# EAGLE board v6 (EAGLE 6.2), part 1 of 2
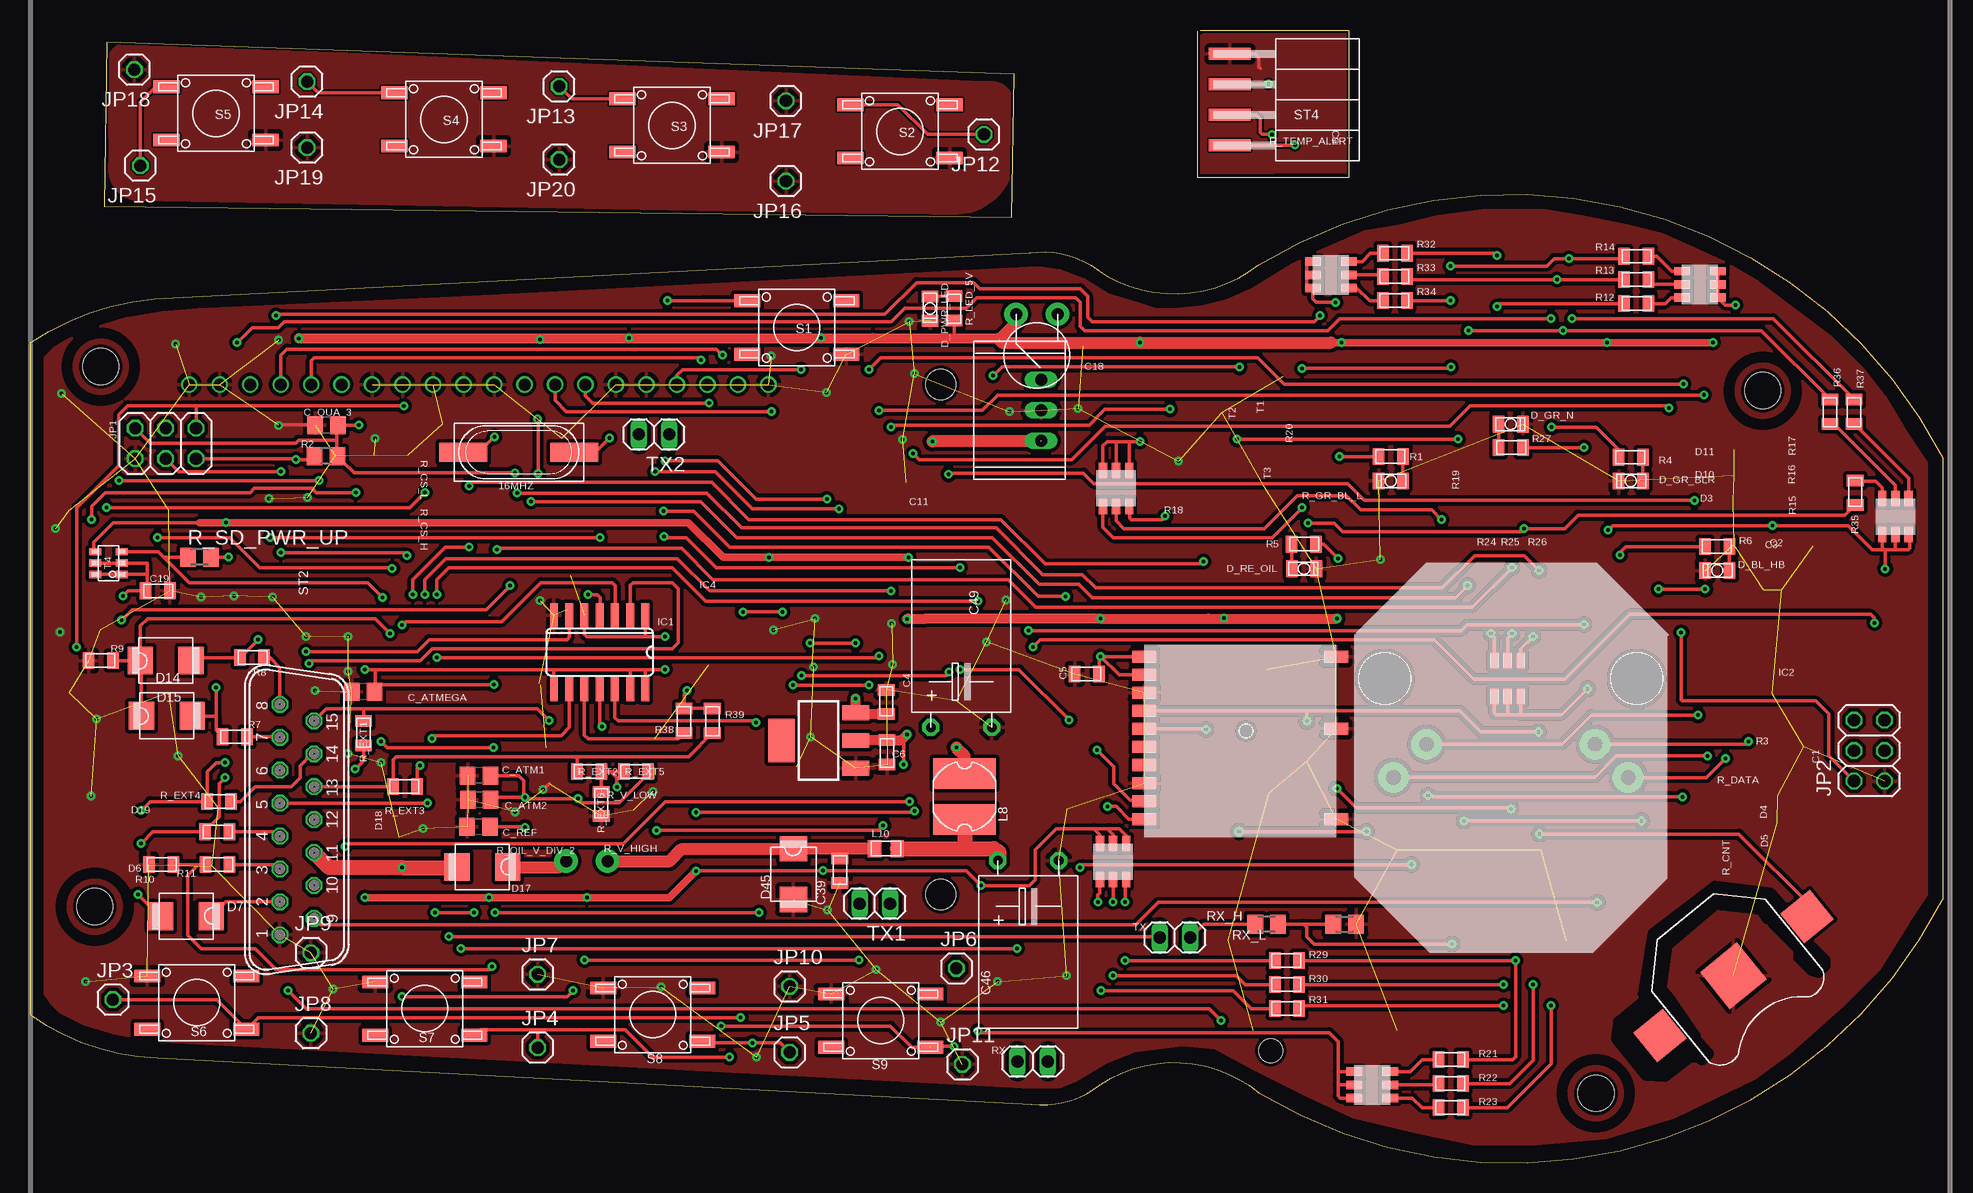
[diagram p0: board, top side]
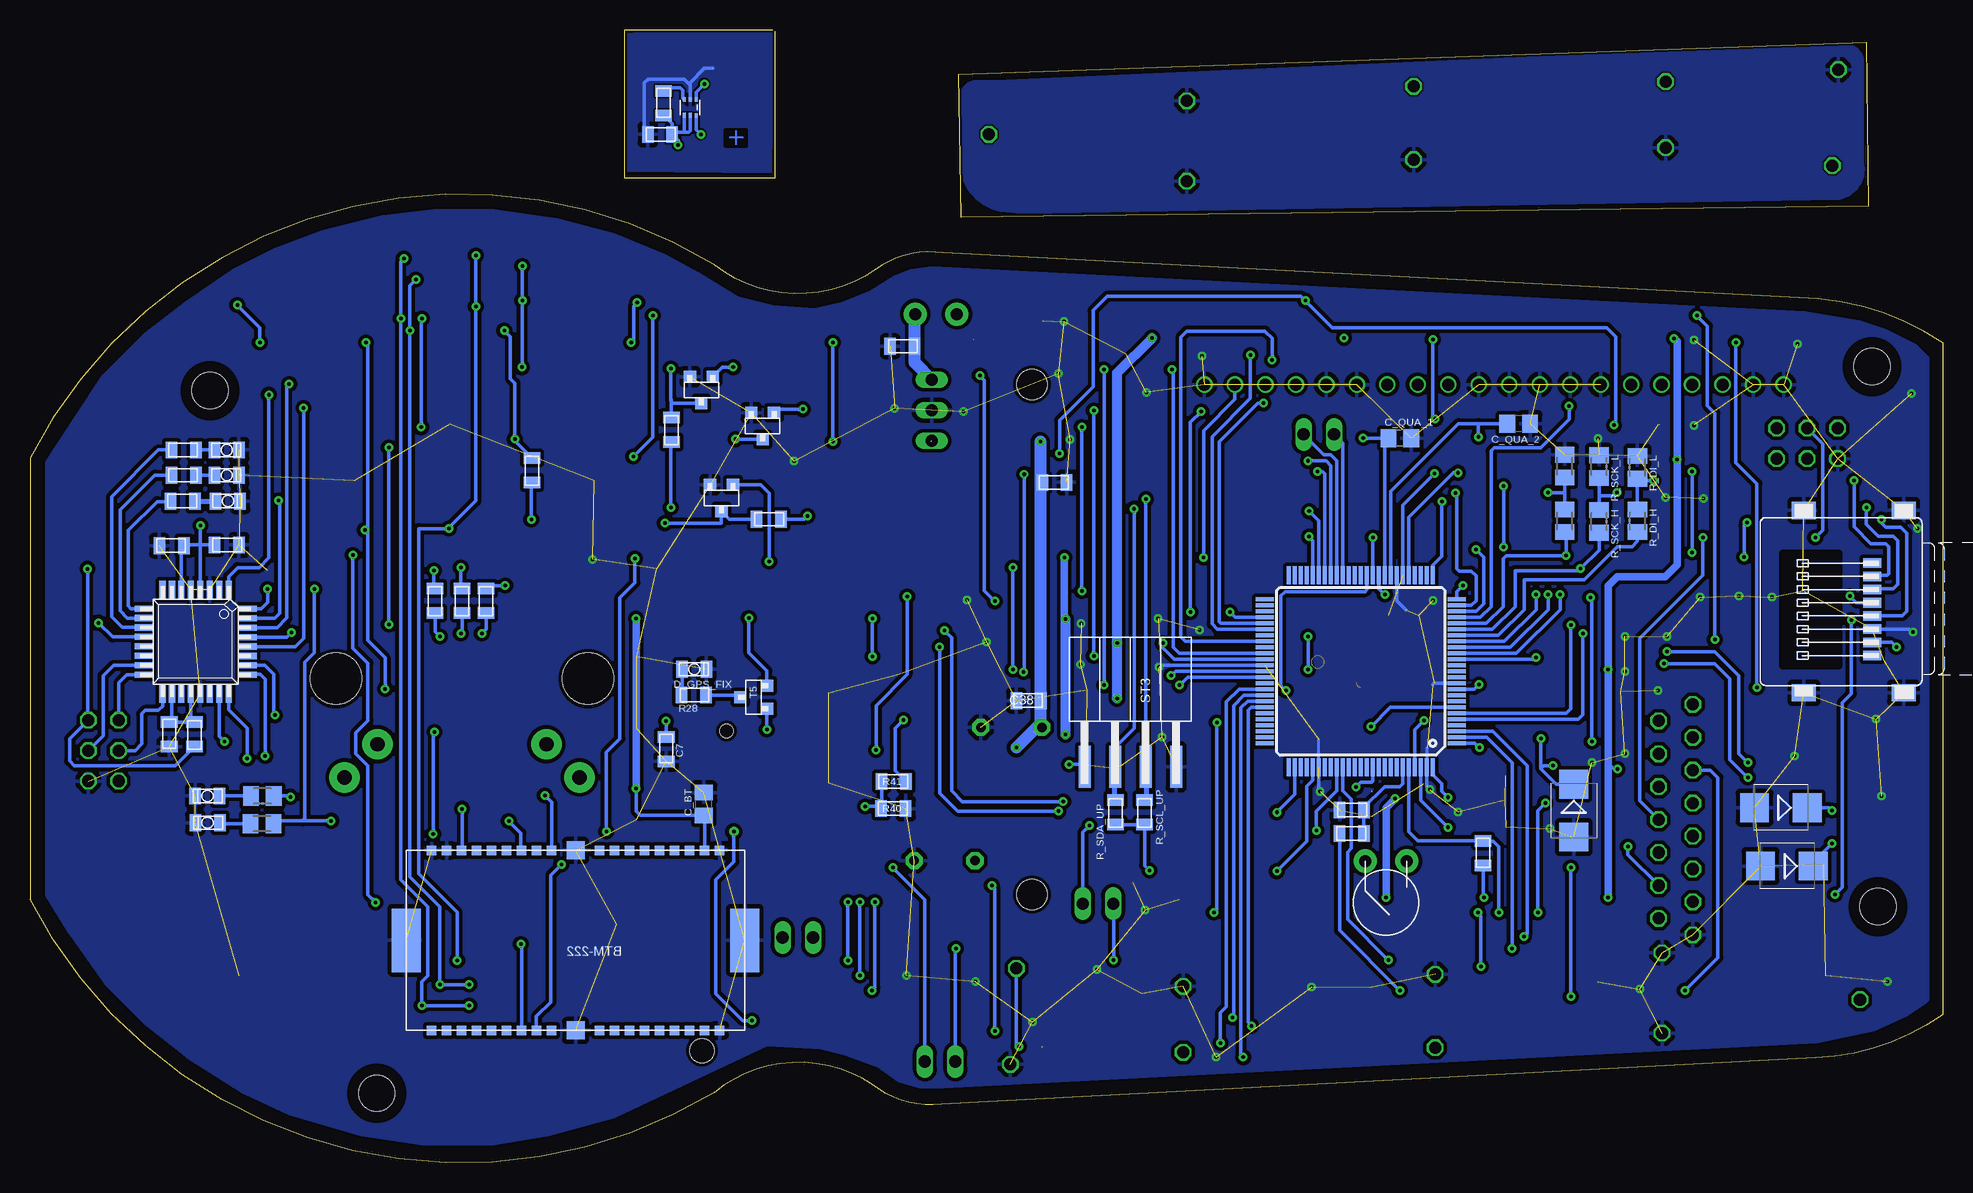
[diagram p1: board, bottom side, seen from below]

Size 159.4 x 94.39 mm. Coordinates in mm from the lower left corner, seen from the top.
Outline: 10.4,71.98 83.35,75.83
Outline: 10.41,71.98 arc29 0,68.34 0,12.34 arc33 10.6,8.74
Outline: 10.59,8.74 83.46,4.88
Outline: 83.32,75.82 arc-45 88.97,74.39
Outline: 88.91,74.44 arc73 102.4,74.84 arc-94 159.4,58.74 159.4,21.94 arc-94 102.4,5.84 arc73 89.17,6.5
Outline: 83.45,4.87 arc45 89.18,6.51
Outline: 97.5,94.39 109.9,94.39 109.9,82.09 97.3,82.09 97.3,94.29
Outline: 6.2,79.69 81.8,78.79 82,90.69 6.4,93.39 6.2,79.69
Copper layers (1*16): Top 0.035mm / dielectric 1.5mm / Bottom 0.035mm
Design rules: minimum track width 0.18mm, minimum drill 0.3mm, track to track 0.15mm, track to pad 0.15mm, pad to pad 0.15mm, via to via 0.15mm, smd to smd 0mil, copper to edge 0.1981mm, drill to drill 0.1981mm, minimum pad ring 0.18mm, minimum via ring 8mil, stop-mask expansion 0mil, vias tented up to drill 25mil, thermal gap 15mil
Net classes: 0 default: width 0.18 mm, drill 0.3 mm, clearance 0.15 mm
Holes 3 mm at 5.4,21.34 5.9,66.34 130.5,5.78 144.4,64.34
Holes 2 mm at 103.4,9.34
tRestrict: area 2.6,18.5 to 8.2,24.1; area 3.1,63.5 to 8.7,69.1; area 127.7,3 to 133.3,8.6; area 141.6,61.5 to 147.2,67.1; area 147.4,15.9 to 149.5,17.9; area 138.2,8.6 to 139.8,10.3; area 145.2,17.8 to 147.5,20.5; area 132.2,7.2 to 138.5,13.7; area 134.4,12.8 to 146.1,23.1; area 135.9,10.1 to 138.8,13.2
bRestrict: area 3.4,19.3 to 7.4,23.3; area 3.9,64.3 to 7.9,68.3; area 128.5,3.8 to 132.5,7.8; area 142.4,62.3 to 146.4,66.3

## Footprints (pad centres in the part's own frame; a part is rotated, then mirrored left to right if it is on the bottom)
POLY_FUSE = drill 1 pad 1.93: P$1 -1.73,0; P$2 1.73,0
XT-HC49S-SMD = smd 4 x 1.6: 1 -4.617,0; 2 4.617,0
RGB_LED = smd 1.3 x 0.7: B+ 0,0.55; B- 3,0.55; G+ 0,1.65; G- 3,1.65; R+ 0,2.75; R- 3,2.75
BATTCON_12MM = smd 3.962 x 3.962: GND 0,0 | smd 3.175 x 3.175: PWR@1 -7.874,0; PWR@2 7.874,0
BTM-222 = smd 0.8 x 0.8: P$1 -12.635,-7.5; P$2 -11.385,-7.5; P$3 -10.135,-7.5; P$4 -8.885,-7.5; P$5 -7.635,-7.5; P$6 -6.385,-7.5; P$7 -5.135,-7.5; P$8 -3.885,-7.5; P$9 -2.635,-7.5; P$11 1.365,-7.5; P$12 2.615,-7.5; P$13 3.865,-7.5; P$14 5.115,-7.5; P$15 6.365,-7.5; P$16 7.615,-7.5; P$17 8.865,-7.5; P$18 10.115,-7.5; P$19 11.365,-7.5; P$20 11.365,7.5; P$21 10.115,7.5; P$22 8.865,7.5; P$23 7.615,7.5; P$24 6.365,7.5; P$25 5.115,7.5; P$26 3.865,7.5; P$27 2.615,7.5; P$28 1.365,7.5; P$30 -2.635,7.5; P$31 -3.885,7.5; P$32 -5.135,7.5; P$33 -6.385,7.5; P$34 -7.635,7.5; P$35 -8.885,7.5; P$36 -10.135,7.5; P$37 -11.385,7.5; P$38 -12.635,7.5 | smd 1.5 x 1.5: P$10 -0.635,-7.5; P$29 -0.635,7.5 | smd 2.4 x 5.3: P$AGND -14.735,0; P$BGND 13.465,0
0805 = smd 0.965 x 1.397: 1 -1.016,0; 2 1.016,0
EL-5-8X13R = drill 0.8 pad 1.422 octagon: 1 0,2.54; 2 0,-2.54
EL-5-8X13 = drill 0.8 pad 1.422 octagon: 1 0,-2.54; 2 0,2.54
C0805 = smd 1.3 x 1.5: 1 -0.95,0; 2 0.95,0
LED-0805 = smd 0.965 x 1.397: 1 -1.016,0; 2 1.016,0
SMB = smd 2.4 x 2.4: A 2.2,0; C -2.2,0
SMB' = smd 2.1 x 2.3: A -2.114,0; K 2.114,0
SOT223 = smd 1.219 x 2.235: 1 -2.311,-3.099; 2 0,-3.099; 3 2.311,-3.099 | smd 3.6 x 2.2: 4 0,3.099
MT3329 = smd 2 x 1: 3D-FIX -8.5,0.15; D+ -8.5,-1.35; D- -8.5,-2.85; EN -8.5,4.65; GND -8.5,3.15; GND2 -8.5,-4.35; GND_3 7.5,6.15; GND_4 7.5,0.15; GND_5 7.5,-7.35; RXD -8.5,-7.35; TXD -8.5,-5.85; VBACKUP -8.5,1.65; VCC -8.5,6.15 | hole 1.1: 0,0
SO14 = smd 0.66 x 2.032: 1 -3.81,-3.073; 2 -2.54,-3.073; 3 -1.27,-3.073; 4 0,-3.073; 5 1.27,-3.073; 6 2.54,-3.073; 7 3.81,-3.073; 8 3.81,3.073; 9 2.54,3.073; 10 1.27,3.073; 11 0,3.073; 12 -1.27,3.073; 13 -2.54,3.073; 14 -3.81,3.073
TQFP-32_7X7 = smd 0.508 x 1.5: 1 -2.756,-4.331; 2 -1.968,-4.331; 3 -1.181,-4.331; 4 -0.394,-4.331; 5 0.394,-4.331; 6 1.181,-4.331; 7 1.968,-4.331; 8 2.756,-4.331; 17 2.756,4.331; 18 1.968,4.331; 19 1.181,4.331; 20 0.394,4.331; 21 -0.394,4.331; 22 -1.181,4.331; 23 -1.968,4.331; 24 -2.756,4.331 | smd 1.5 x 0.508: 9 4.331,-2.756; 10 4.331,-1.968; 11 4.331,-1.181; 12 4.331,-0.394; 13 4.331,0.394; 14 4.331,1.181; 15 4.331,1.968; 16 4.331,2.756; 25 -4.331,2.768; 26 -4.331,1.981; 27 -4.331,1.194; 28 -4.331,0.406; 29 -4.331,-0.381; 30 -4.331,-1.169; 31 -4.331,-1.956; 32 -4.331,-2.756
TQFP100 = smd 1.5 x 0.35: 1 -8,6; 2 -8,5.5; 3 -8,5; 4 -8,4.5; 5 -8,4; 6 -8,3.5; 7 -8,3; 8 -8,2.5; 9 -8,2; 10 -8,1.5; 11 -8,1; 12 -8,0.5; 13 -8,0; 14 -8,-0.5; 15 -8,-1; 16 -8,-1.5; 17 -8,-2; 18 -8,-2.5; 19 -8,-3; 20 -8,-3.5; 21 -8,-4; 22 -8,-4.5; 23 -8,-5; 24 -8,-5.5; 25 -8,-6; 51 8,-6; 52 8,-5.5; 53 8,-5; 54 8,-4.5; 55 8,-4; 56 8,-3.5; 57 8,-3; 58 8,-2.5; 59 8,-2; 60 8,-1.5; 61 8,-1; 62 8,-0.5; 63 8,0; 64 8,0.5; 65 8,1; 66 8,1.5; 67 8,2; 68 8,2.5; 69 8,3; 70 8,3.5; 71 8,4; 72 8,4.5; 73 8,5; 74 8,5.5; 75 8,6 | smd 0.35 x 1.5: 26 -6,-8; 27 -5.5,-8; 28 -5,-8; 29 -4.5,-8; 30 -4,-8; 31 -3.5,-8; 32 -3,-8; 33 -2.5,-8; 34 -2,-8; 35 -1.5,-8; 36 -1,-8; 37 -0.5,-8; 38 0,-8; 39 0.5,-8; 40 1,-8; 41 1.5,-8; 42 2,-8; 43 2.5,-8; 44 3,-8; 45 3.5,-8; 46 4,-8; 47 4.5,-8; 48 5,-8; 49 5.5,-8; 50 6,-8; 76 6,8; 77 5.5,8; 78 5,8; 79 4.5,8; 80 4,8; 81 3.5,8; 82 3,8; 83 2.5,8; 84 2,8; 85 1.5,8; 86 1,8; 87 0.5,8; 88 0,8; 89 -0.5,8; 90 -1,8; 91 -1.5,8; 92 -2,8; 93 -2.5,8; 94 -3,8; 95 -3.5,8; 96 -4,8; 97 -4.5,8; 98 -5,8; 99 -5.5,8; 100 -6,8
2X03 = drill 1.016 octagon: 1 -2.54,-1.27; 2 -2.54,1.27; 3 0,-1.27; 4 0,1.27; 5 2.54,-1.27; 6 2.54,1.27
1X01 = drill 1.016 octagon: 1 0,0
L-PD54 = smd 2.54 x 5.2: 1 -1.905,0; 2 1.905,0
0805+603 = smd 1.11 x 1.43: 1 -0.953,0; 2 0.953,0
NHD_2.7_SOLO_RO = drill 1: CS -102.51,24.5; DC -69.49,24.5; GND0 -61.87,24.5; GND1 -72.03,24.5; GND2 -74.57,24.5; GND3 -84.73,24.5; GND4 -87.27,24.5; GND5 -89.81,24.5; GND6 -92.35,24.5; GND7 -94.89,24.5; GND8 -107.59,24.5; GND9 -110.13,24.5; NC0 -66.95,24.5; NC1 -82.19,24.5; NC2 -97.43,24.5; NC3 -105.05,24.5; RES -99.97,24.5; SCLK -77.11,24.5; SDIN -79.65,24.5; VDD0 -64.41,24.5 | hole 2.5: -47.5,-18; -47.5,24.5
SIP3 = drill 1 long: GND 5.75,2; IN 3.21,2; OUT 8.29,2
R0805 = smd 1.3 x 1.5: 1 -0.95,0; 2 0.95,0
M0805 = smd 1.3 x 1.6: 1 -0.95,0; 2 0.95,0
1X02 = drill 1.016 long: 1 -1.27,0; 2 1.27,0
SW-ECO = smd 2.184 x 1.067: 1 -4.128,2.223; 2 -4.128,-2.223; 3 4.128,2.223; 4 4.128,-2.223
SD_MICRO = smd 0.8 x 1.5: 1 3.2,-9.35; 2 2.1,-9.35; 3 1,-9.35; 4 -0.1,-9.35; 5 -1.2,-9.35; 6 -2.3,-9.35; 7 -3.4,-9.35; 8 -4.5,-9.35 | smd 1.45 x 2: GND 7.6,-11.95; GND2 7.6,-3.65; GND3 -7.6,-11.95; GND4 -7.6,-3.65
BL17SMD_1X4 = smd 1 x 3.5: 1 -3.81,-7.31; 2 -1.27,-7.31; 3 1.27,-7.31; 4 3.81,-7.31
SOT-23 = smd 1.016 x 1.016: 1 0.953,1.111; 2 -0.952,1.111; 3 0,-1.111
SOT-23-6 = smd 0.61 x 1.016: 1 -0.95,-1.1; 2 0,-1.1; 3 0.95,-1.1; 4 0.95,1.1; 5 0,1.1; 6 -0.95,1.1
SOT563 = smd 0.25 x 0.4: 1 -0.5,-0.66; 2 0,-0.66; 3 0.5,-0.66; 4 0.5,0.66; 5 0,0.66; 6 -0.5,0.67
STEPPER = drill 1.2 pad 2.54: 1+ 5.47,7.03; 1- 8.23,9.785; 2+ 8.23,-9.785; 2- 5.47,-7.03 | hole 4.3: 0,10.5; 0,-10.5
IP67-SUB-D = drill 1.016 octagon: 1 -9.601,1.422; 2 -6.858,1.422; 3 -4.115,1.422; 4 -1.372,1.422; 5 1.372,1.422; 6 4.115,1.422; 7 6.858,1.422; 8 9.601,1.422; 9 -8.23,-1.422; 10 -5.486,-1.422; 11 -2.743,-1.422; 12 0,-1.422; 13 2.743,-1.422; 14 5.486,-1.422; 15 8.23,-1.422

## Placement (x,y rotation side)
5V_F  600mA  [POLY_FUSE]  83.9,70.72 180 top
12V_F1  1.1A  [POLY_FUSE]  46.4,25.14 180 bottom
16MHZ  16Mhz  [XT-HC49S-SMD]  40.74,59.21 180 top
18632422  RGB_LED  [RGB_LED]  88.85,57.69 270 top
BAT_CLIP1  F_908642  [BATTCON_12MM]  141.96,15.57 219 top
BLUETOOTH  BTM-222  [BTM-222]  114.57,18.53 180 bottom
C1  100nF  [0805]  147.8,35.69 270 bottom
C2  100nF  [0805]  147.6,51.42 0 bottom
C3  100nF  [0805]  143,51.48 180 bottom
C4  100n/20V  [0805]  71.35,38.39 270 top
C5  100nF  [0805]  88.08,40.72 0 top
C6  10u/20V  [0805]  71.42,34.19 90 top
C7  100nF  [0805]  106.38,34.47 270 bottom
C9  100nF  [0805]  106.9,85.69 180 bottom
C11  100n/20V  [0805]  74.03,56.69 0 bottom
C18  100n/20V  [0805]  86.7,68.04 180 bottom
C19  100n  [0805]  10.64,47.66 180 top
C38  2µ2/100V  [0805]  76.19,38.51 0 bottom
C39  2µ2/100V  [0805]  67.49,24.34 270 top
C46  470µ  [EL-5-8X13R]  83.19,25.17 90 top
C49  470µ  [EL-5-8X13]  77.62,36.27 270 top
C_ATM1  100nF  [C0805]  37.42,32.26 180 top
C_ATM2  100nF  [C0805]  37.44,30.23 180 top
C_ATMEGA  100nF  [C0805]  27.77,39.24 180 top
C_BT  200nF  [C0805]  103.25,29.89 90 bottom
C_QUA_1  22pF  [C0805]  45.25,60.37 180 bottom
C_QUA_2  22pF  [C0805]  35.35,61.59 180 bottom
C_QUA_3  22pF  [C0805]  24.7,61.46 180 top
C_REF  100nF  [C0805]  37.37,27.98 180 top
D3  [LED-0805]  142.91,55.13 0 bottom
D4  Red  [LED-0805]  144.62,30.56 180 bottom
D5  Blue  [LED-0805]  144.6,28.33 180 bottom
D6  20V-Zdiode  [SMB]  12.99,24.72 180 bottom
D7  SS24  [SMB']  13,20.54 0 top
D10  [LED-0805]  143,57.29 0 bottom
D11  [LED-0805]  143,59.39 0 bottom
D14  SS24  [SMB']  11.3,41.84 180 top
D15  SS24  [SMB']  11.4,37.24 180 top
D17  SS24  [SMB']  37.7,24.64 0 top
D18  20V-ZD.  [SMB]  30.75,29.34 270 bottom
D19  20V-ZD.  [SMB]  13.5,29.59 180 bottom
D45  SM6T30V  [SMB']  63.62,24.04 90 top
D_BL_HB  HighB _ 645-598-8191-107F  [LED-0805]  140.6,49.34 180 top
D_GPS_FIX  Red  [LED-0805]  104.05,41.12 0 bottom
D_GR_BLR  BL_R  [LED-0805]  133.4,56.81 180 top
D_GR_N  N _ M 645-598-8110-107F  [LED-0805]  123.4,61.54 0 top
D_PWR_LED  Red  [LED-0805]  75,71.18 270 top
D_RE_OIL  OIL M 645-598-8110-107F  [LED-0805]  106.17,49.49 0 top
DCDC53.3  AP1117E33G  [SOT223]  65.71,35.18 90 top
GPS  MT3329  [MT3329]  101.35,35.99 0 top
IC1  4093D  [SO14]  47.47,42.54 180 top
IC2  AT-MEGA-8  [TQFP-32_7X7]  145.6,43.42 180 bottom
IC4  ATMEGA2560-16AU  [TQFP100]  48.5,40.95 180 bottom
JP1  ICSP  [2X03]  11.3,59.94 0 top
JP2  ICSP  [2X03]  153.28,34.34 90 top
JP3  [1X01]  6.9,13.59 0 top
JP4  [1X01]  42.3,9.59 0 top
JP5  [1X01]  63.3,9.19 0 top
JP6  [1X01]  77.2,16.19 0 top
JP7  [1X01]  42.3,15.69 0 top
JP8  [1X01]  23.4,10.79 0 top
JP9  [1X01]  23.4,17.49 0 top
JP10  [1X01]  63.3,14.69 0 top
JP11  [1X01]  77.7,8.19 0 top
JP12  [1X01]  79.5,85.69 180 top
JP13  [1X01]  44.1,89.69 180 top
JP14  [1X01]  23.1,90.09 180 top
JP15  [1X01]  9.2,83.09 180 top
JP16  [1X01]  63,81.79 180 top
JP17  [1X01]  63,88.49 180 top
JP18  [1X01]  8.7,91.09 180 top
JP19  [1X01]  23.1,84.59 180 top
JP20  [1X01]  44.1,83.59 180 top
L8  22µH 1A  [L-PD54]  77.88,30.52 90 top
L10  BLM21PG221SN1  [0805+603]  71.32,26.17 0 top
NHD_2.7  NHD_2.7_SOLO_RO  [NHD_2.7_SOLO_RO]  123.4,40.34 0 top
PWR_R78  R-7805-1.0  [SIP3]  86.25,56.97 90 top
R1  250R  [0805]  113.4,58.84 0 top
R2  10K  [R0805]  24.67,58.88 180 top
R3  10R  [0805]  145.7,35.69 90 bottom
R4  250R  [0805]  133.4,58.79 0 top
R5  565R  [0805]  106.15,51.55 180 top
R6  490R  [0805]  140.6,51.34 0 top
R7  310R  [0805]  17.05,35.49 180 top
R8  310R  [0805]  18.5,42.09 180 top
R9  10k  [0805]  5.9,41.84 0 top
R10  5k / n.b. (Reed)  [0805]  10.93,24.84 180 top
R11  7k  [0805]  15.62,24.84 180 top
R12  100R  [0805]  133.85,71.59 180 top
R13  90R  [0805]  133.85,73.59 180 top
R14  90R  [0805]  133.85,75.54 180 top
R15  1k  [0805]  146.67,55.13 0 bottom
R16  1k  [0805]  146.6,57.29 0 bottom
R17  1k  [0805]  146.6,59.39 0 bottom
R18  100R  [0805]  97.85,53.62 180 bottom
R19  90R  [0805]  117.58,57.72 90 bottom
R20  90R  [0805]  105.95,61.09 90 bottom
R21  100R  [0805]  118.4,8.59 0 top
R22  90R  [0805]  118.4,6.59 0 top
R23  90R  [0805]  118.4,4.59 0 top
R24  100R  [0805]  121.4,46.84 90 bottom
R25  90R  [0805]  123.4,46.84 90 bottom
R26  90R  [0805]  125.65,46.84 90 bottom
R27  560R  [0805]  123.4,59.59 180 top
R28  1k  [0805]  104.08,38.97 180 bottom
R29  100R  [0805]  104.75,16.84 0 top
R30  90R  [0805]  104.75,14.84 0 top
R31  90R  [0805]  104.75,12.84 0 top
R32  100R  [0805]  113.75,75.79 0 top
R33  90R  [0805]  113.75,73.84 0 top
R34  90R  [0805]  113.75,71.84 0 top
R35  100R  [0805]  152.1,55.84 270 top
R36  90R  [0805]  150,62.59 90 top
R37  90R  [0805]  152,62.59 90 top
R38  0R  [0805]  54.5,36.84 90 top
R39  n.b.  [0805]  56.86,36.84 90 top
R40  2k7  [0805]  87.45,29.52 0 bottom
R41  1k2  [0805]  87.42,31.77 0 bottom
R_CNT  220R  [M0805]  140.06,28.25 0 bottom
R_CS_H  1k2  [M0805]  31.5,53.49 270 bottom
R_CS_L  2k7  [M0805]  31.5,58.04 270 bottom
R_DATA  220R  [M0805]  140.04,30.56 0 bottom
R_DI_H  1k2  [M0805]  25.45,53.49 270 bottom
R_DI_L  2k7  [M0805]  25.45,57.94 270 bottom
R_DZ_DIV1  5k  [0805]  15.61,27.58 180 top
R_EXT1  390R  [0805]  27.8,35.79 270 top
R_EXT2  n.b.  [0805]  46.6,32.59 0 top
R_EXT3  5k  [0805]  31.25,31.34 0 top
R_EXT4  5k  [0805]  15.75,30.09 180 top
R_EXT5  n.b.  [0805]  50.5,32.59 0 top
R_EXT6  n.b.  [0805]  47.6,29.89 270 top
R_GR_BL_L  BL_L  [LED-0805]  113.4,56.81 180 top
R_LED_5V  1k  [0805]  77,71.22 90 top
R_OIL_V_DIV_2  220  [0805]  38.31,25.79 270 bottom
R_SCK_H  1k2  [M0805]  28.65,53.44 270 bottom
R_SCK_L  2k7  [M0805]  28.65,58 270 bottom
R_SCL_UP  1K  [0805]  66.53,29.19 90 bottom
R_SD_PWR_UP  10k  [M0805]  14.12,50.47 0 top
R_SDA_UP  1K  [0805]  68.95,29.19 90 bottom
R_TEMP_ALERT  1k  [0805]  106.6,88.29 270 bottom
R_V_HIGH  2k2  [0805]  49.25,27.44 0 bottom
R_V_LOW  1k  [0805]  49.25,29.39 180 bottom
RX  [1X02]  83.56,8.44 0 top
RX_H  1k2  [M0805]  103.06,19.88 0 top
RX_L  2k7  [M0805]  109.56,19.88 180 top
S1  [SW-ECO]  63.91,69.6 180 top
S2  U  [SW-ECO]  72.5,85.94 180 top
S3  R  [SW-ECO]  53.5,86.44 180 top
S4  D  [SW-ECO]  34.5,86.94 180 top
S5  L  [SW-ECO]  15.5,87.44 180 top
S6  U  [SW-ECO]  13.9,13.34 0 top
S7  R  [SW-ECO]  32.9,12.84 0 top
S8  D  [SW-ECO]  51.9,12.34 0 top
S9  L  [SW-ECO]  70.9,11.84 0 top
ST2  SD_MICRO  [SD_MICRO]  15.22,46.76 90 bottom
ST3  [BL17SMD_1X4]  67.7,40.29 0 bottom
ST4  [BL17SMD_1X4]  107.3,88.59 270 top
T1  Farnell: 1299313  [SOT-23]  103.45,64.39 0 bottom
T2  Farnell: 1299313  [SOT-23]  98.35,61.39 0 bottom
T3  Farnell: 1299313  [SOT-23]  101.78,55.39 0 bottom
T4  T-IRLMS6702  [SOT-23-6]  6.55,49.97 90 top
T5  Farnell: 1299313  [SOT-23]  99.1,38.79 270 bottom
TMP102AIDRLT  TMP102  [SOT563]  104.4,87.94 180 bottom
TX  [1X02]  95.42,18.77 180 top
TX1  [1X02]  70.4,21.59 180 top
TX2  [1X02]  52,60.69 180 top
U$3  STEPPER  [STEPPER]  123.4,40.34 270 top
U$14  RGB_LED  [RGB_LED]  157.1,52.34 90 top
U$15  RGB_LED  [RGB_LED]  140.65,74.84 180 top
U$16  RGB_LED  [RGB_LED]  106.9,72.34 0 top
U$18  RGB_LED  [RGB_LED]  88.6,26.59 270 top
U$19  RGB_LED  [RGB_LED]  110.35,4.84 0 top
U$20  RGB_LED  [RGB_LED]  124.78,38.84 90 top
X2  [IP67-SUB-D]  22.25,28.59 90 top

## Library data of the parts
5V_F 12V_F1 18632422 DCDC53.3 GPS NHD_2.7 PWR_R78 ST2 U$3 U$14-U$16 U$18-U$20 = Kolja
16MHZ = XT
BAT_CLIP1 TMP102AIDRLT = SparkFun
BLUETOOTH = btm-222
C1-C7 C9 C11 C18 C19 C38 C39 C46 C49 D7 D14 D15 D17 D45 L8 L10 R1 R3-R41 R_DZ_DIV1 R_EXT1-R_EXT6 R_LED_5V R_OIL_V_DIV_2 R_SCL_UP R_SDA_UP R_TEMP_ALERT R_V_HIGH R_V_LOW T1-T5 = RCLDT
C_ATM1 C_ATM2 C_ATMEGA C_BT C_QUA_1-C_QUA_3 C_REF R2 R_CNT R_DATA = rcl
D3-D5 D10 D11 D_BL_HB D_GPS_FIX D_GR_BLR D_GR_N D_PWR_LED D_RE_OIL R_GR_BL_L = OPTO
D6 D18 D19 = diode
IC1 = 40xx
IC2 = µP´s+Pic´s
IC4 = atmel-2005
JP1-JP20 RX TX TX1 TX2 = pinhead
R_CS_H R_CS_L R_DI_H R_DI_L R_SCK_H R_SCK_L R_SD_PWR_UP RX_H RX_L = resistor
S1-S9 = SWITCH+RELAIS
ST3 ST4 = Stift+Buchsenleisten; ARTIKELNUMMER: 151469; BESONDERHEITEN: Teilstück von 10pol. Buchsenleiste; HERSTELLER: Fischer BL17/SMD-10/Z (lose), MPE BL SMD 30-010 C/TRU(reel); PACKAGE: SMD liegend L=7mm; RM: 2,54; STROM: 3A; WERT: 4Pin.
X2 = Kolja2

## Nets
12V: D17.A R_V_HIGH.1 X2.11
12V_SAFE: 12V_F1.P$2 C39.1 D45.K L10.1
+3V3_EXT: BLUETOOTH.P$2 BLUETOOTH.P$17 C5.2 C6.2 C_BT.1 DCDC53.3.2 GPS.EN GPS.VCC NHD_2.7.VDD0 R_SD_PWR_UP.2 ST3.1 T4.4 T5.2
+3V3_EXT_S: C19.2 ST2.4 T4.1 T4.2 T4.5 T4.6
A0: IC4.97 R_EXT1.1 X2.15
A1: IC4.96 R_OIL_V_DIV_2.1 X2.5
A2: IC4.95 R_V_HIGH.2 R_V_LOW.1
A3: IC4.94
A4: IC4.93
A5: IC4.92
A6: IC4.91
A7: IC4.90 R_EXT2.2 R_EXT5.1 R_EXT6.1
A8: IC4.89
A9: IC4.88
A10: IC4.87
A11: IC4.86
A12: IC4.85 TX1.2
A13: IC4.84 TX1.1
A14: IC4.83
A15: IC4.82
ANT: BLUETOOTH.P$37
ARD_RES_OUT: C_QUA_3.1 IC2.28 IC4.30 JP1.2 R2.1 S1.4
ARD_RX_5: RX_H.1 TX.1
ARD_RX_33: BLUETOOTH.P$26 RX_H.2 RX_L.2
B_D: IC4.66 JP5.1 S8.4
B_L: IC4.69 JP6.1 S9.4
B_R: IC4.68 JP4.1 S7.4
B_U: IC4.67 JP3.1 S6.4
BAT+: C11.1 C38.2 C49.1 L8.2 PWR_R78.IN
BL_L: R8.1 X2.8
BL_R: R7.1 X2.7
BLUE_INSTR: R14.2 R20.2 R23.2 R31.2 R34.2 R37.2 T1.3
CONNECT: BLUETOOTH.P$13 IC2.32 R_CNT.2
D2: IC1.3 IC4.6
D3: IC1.11 IC4.7
D4: IC4.1 R_SD_PWR_UP.1 T4.3
D5: D14.K D15.K IC4.5 R9.2
D6: IC2.1 IC4.15
D7: IC4.16 T3.1
D8: IC4.17 T2.1
D9: IC4.18 T1.1
D10: IC4.23 R25.2
D11: IC4.24 R26.2
D12: D7.A IC4.25
D13: IC4.26 R24.2
D20: IC4.44 R_SDA_UP.2 ST3.2
D21: IC4.43 R_SCL_UP.2 ST3.3
D22: IC4.78
D23: IC2.12 IC4.77
D24: IC4.76
D25: IC4.75
D26: IC4.74
D27: IC4.73
D28: IC4.72
D29: IC4.71
D30: IC4.60 NHD_2.7.DC
D31: IC4.59
D32: IC4.58 NHD_2.7.RES
D33: IC4.57
D34: IC4.56 NHD_2.7.CS
D35: IC4.55 NHD_2.7.SCLK
D36: IC4.54 NHD_2.7.SDIN
D37: IC4.53
D38: IC4.50
D39: IC4.70
D40: IC4.52
D41: IC4.51
D42: IC4.42 TX2.1
D43: IC4.41 TX2.2
D44: IC4.40
D45: IC4.39
D46: IC4.38
D47: IC4.37 R38.2 R39.2
D48: IC4.36 X2.12
D49: IC1.4 IC4.35
D50: IC4.22 JP1.6 ST2.7
D51: IC4.21 JP1.3 R_CS_H.2
D52: IC4.20 JP1.4 R_SCK_H.2
D53: IC4.19 R_DI_H.2
DZ: D6.C IC1.2 R_DZ_DIV1.2
DZ_IN: R_DZ_DIV1.1 X2.4
E_B_D: JP14.1 S4.4
E_B_L: JP15.1 S5.4
E_B_R: JP13.1 S3.4
E_B_U: JP12.1 S2.4
E_GND: JP16.1 JP17.1 JP18.1 JP19.1 JP20.1 S2.1 S3.1 S4.1 S5.1
EXT_3.3V: C9.1 R_TEMP_ALERT.2 ST4.4 TMP102AIDRLT.4 TMP102AIDRLT.5
EXT_GND: C9.2 ST4.1 TMP102AIDRLT.2
EXT_SCL: ST4.2 TMP102AIDRLT.1
EXT_SDA: ST4.3 TMP102AIDRLT.6
EXTEND1: D19.C IC1.6 R_EXT4.2
EXTEND2: D18.C IC1.9 R_EXT3.2
GND: BAT_CLIP1.GND BLUETOOTH.P$1 BLUETOOTH.P$10 BLUETOOTH.P$18 BLUETOOTH.P$19 BLUETOOTH.P$29 BLUETOOTH.P$38 BLUETOOTH.P$AGND BLUETOOTH.P$BGND C1.2 C2.1 C3.1 C4.1 C5.1 C6.1 C7.2 C11.2 C18.2 C19.1 C38.1 C39.2 C46.2 C49.2 C_ATM1.2 C_ATM2.2 C_ATMEGA.2 C_BT.2 C_QUA_1.1 C_QUA_2.1 C_QUA_3.2 C_REF.2 D3.2 D4.2 D5.2 D6.A D10.2 D11.2 D18.A D19.A D45.A D_BL_HB.2 D_GPS_FIX.2 D_GR_BLR.2 D_GR_N.2 D_PWR_LED.2 D_RE_OIL.2 DCDC53.3.1 GPS.GND GPS.GND2 GPS.GND_3 GPS.GND_4 GPS.GND_5 IC1.7 IC2.3 IC2.5 IC2.21 IC4.11 IC4.32 IC4.62 IC4.81 IC4.99 JP1.1 JP2.1 JP7.1 JP8.1 JP9.1 JP10.1 JP11.1 NHD_2.7.GND0 NHD_2.7.GND1 NHD_2.7.GND2 NHD_2.7.GND3 NHD_2.7.GND4 NHD_2.7.GND5 NHD_2.7.GND6 NHD_2.7.GND7 NHD_2.7.GND8 NHD_2.7.GND9 PWR_R78.GND R9.1 R10.2 R40.2 R_CS_L.1 R_DI_L.1 R_EXT6.2 R_GR_BL_L.2 R_SCK_L.1 R_V_LOW.2 RX_L.1 S1.1 S6.1 S7.1 S8.1 S9.1 ST2.6 ST2.GND ST2.GND2 ST2.GND3 ST2.GND4 ST3.4 T1.2 T2.2 T3.2 X2.1
GREEN_INSTR: R13.2 R19.2 R22.2 R30.2 R33.2 R36.2 T2.3
HIGH_BEAM: R6.1 X2.9
KUPPLUNG_IN: D7.K X2.2
M1: IC2.23 U$3.1+
M2: IC2.24 U$3.1-
M3: IC2.25 U$3.2+
M4: IC2.26 U$3.2-
MISO_AT8: IC2.16 JP2.6
MOSI_AT8: IC2.15 JP2.3
N$1: C46.1 L8.1 L10.2
N$2: D14.A R1.1 R8.2
N$3: C1.1 IC2.18 IC2.20 R3.2
N$4: R_TEMP_ALERT.1 TMP102AIDRLT.3
N$5: D5.1 R_CNT.1
N$6: R31.1 U$18.B-
N$7: R30.1 U$18.G-
N$8: R29.1 U$18.R-
N$9: D_PWR_LED.1 R_LED_5V.2
N$10: R34.1 U$16.B-
N$11: D15.A R4.1 R7.2
N$12: D4.1 R_DATA.1
N$13: R_CS_H.1 R_CS_L.2 ST2.3
N$14: IC2.11 R17.1
N$15: D_GPS_FIX.1 R28.2
N$16: GPS.3D-FIX T5.1
N$17: R28.1 T5.3
N$18: IC2.10 R16.1
N$19: 5V_F.P$1 C18.1 PWR_R78.OUT
N$20: IC2.9 R15.1
N$21: R33.1 U$16.G-
N$22: R32.1 U$16.R-
N$23: R_SCK_H.1 R_SCK_L.2 ST2.5
N$24: 12V_F1.P$1 D17.K
N$26: R_DI_H.1 R_DI_L.2 ST2.2
N$27: R37.1 U$14.B-
N$29: IC4.49
N$30: R36.1 U$14.G-
N$31: IC4.27
N$32: R35.1 U$14.R-
N$33: R1.2 R_GR_BL_L.1
N$34: D_GR_BLR.1 R4.2
N$35: 16MHZ.2 C_QUA_2.2 IC4.33
N$36: 16MHZ.1 C_QUA_1.2 IC4.34
N$37: C_REF.1 IC4.98
N$38: D_RE_OIL.1 R5.2
N$39: D_BL_HB.1 R6.2
N$40: IC1.10 R38.1
N$51: R12.1 U$15.R-
N$52: R13.1 U$15.G-
N$53: R14.1 U$15.B-
N$54: 18632422.R- R18.1
N$55: 18632422.G- R19.1
N$56: 18632422.B- R20.1
N$57: R21.1 U$19.R-
N$58: R22.1 U$19.G-
N$59: R23.1 U$19.B-
N$63: R24.1 U$20.R-
N$64: R25.1 U$20.G-
N$65: R26.1 U$20.B-
N$69: D_GR_N.1 R27.2
N$78: R_EXT4.1 X2.14
N$79: R39.1 R_EXT2.1 R_EXT3.1 X2.13
N_IN: R27.1 X2.10
OIL_PRESSURE: R5.1 X2.6
P0: D3.1 R15.2
P1: D10.1 R16.2
P2: D11.1 R17.2
RED_INSTR: R12.2 R18.2 R21.2 R29.2 R32.2 R35.2 T3.3
REED: IC1.12 R10.1 R11.2
REED_IN: R11.1 X2.3
RESETAVR_AT8: IC2.29 JP2.2
RX0: IC4.2 RX.1
RX1: GPS.TXD IC4.45
RX2: IC4.12
RX3: IC2.31 IC4.63
SCK_AT8: IC2.17 JP2.4
TO_DATA_LED: BLUETOOTH.P$11 R_DATA.2
TX: BLUETOOTH.P$27 RX.2
TX0: IC4.3 TX.2
TX1: IC4.46 R41.2
TX1_3.3: GPS.RXD R40.1 R41.1
TX2: IC4.13
TX3: IC2.30 IC4.64
V_BAK: BAT_CLIP1.PWR@1 C7.1 GPS.VBACKUP
VDD: 5V_F.P$2 18632422.B+ 18632422.G+ 18632422.R+ C2.2 C3.2 C4.2 C_ATM1.1 C_ATM2.1 C_ATMEGA.1 DCDC53.3.3 IC1.1 IC1.5 IC1.8 IC1.13 IC1.14 IC2.4 IC2.6 IC4.10 IC4.31 IC4.61 IC4.80 IC4.100 JP1.5 JP2.5 R2.2 R3.1 R_EXT1.2 R_EXT5.2 R_LED_5V.1 R_OIL_V_DIV_2.2 R_SCL_UP.1 R_SDA_UP.1 U$14.B+ U$14.G+ U$14.R+ U$15.B+ U$15.G+ U$15.R+ U$16.B+ U$16.G+ U$16.R+ U$18.B+ U$18.G+ U$18.R+ U$19.B+ U$19.G+ U$19.R+ U$20.B+ U$20.G+ U$20.R+